# Altium PCB RobotArm_Olav_Nikolai.PcbDoc
Units mm, origin at the board's own origin, x right, y up, seen from the top; angles counter-clockwise.
Board outline 60 x 30 mm, 2 copper layers (Top Layer, Bottom Layer); 36 components, 60 nets, 160 pads, 13 vias.
Unrouted connection lines stored in the file: 1.
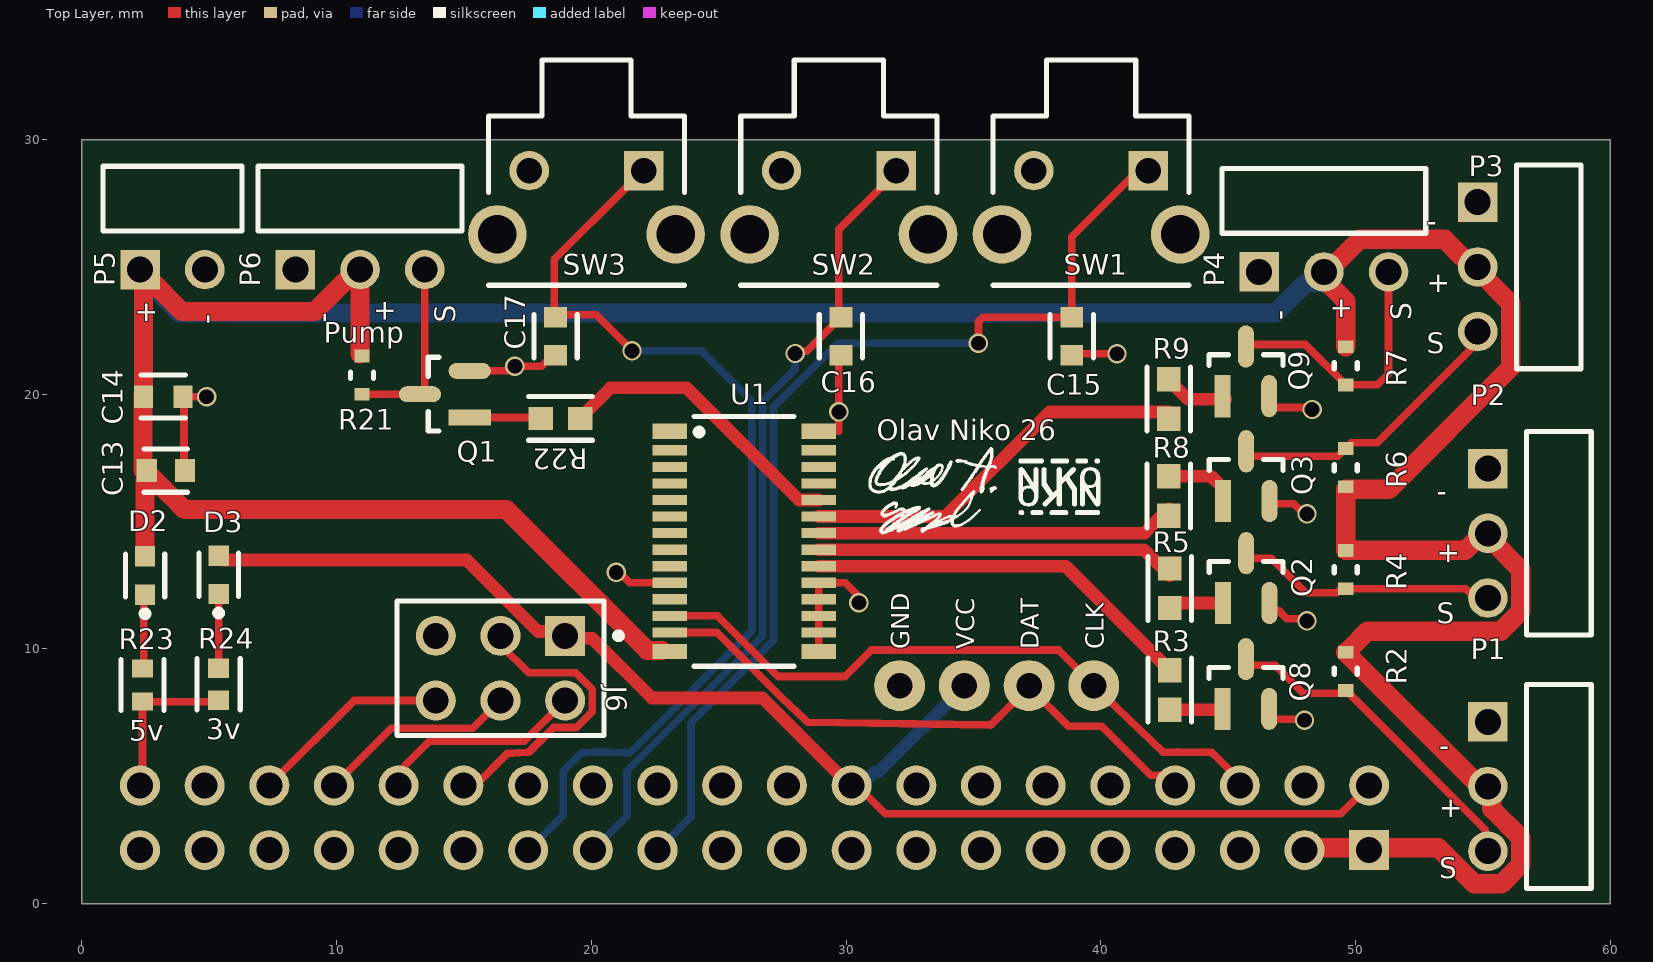
[diagram p0: Top Layer view]
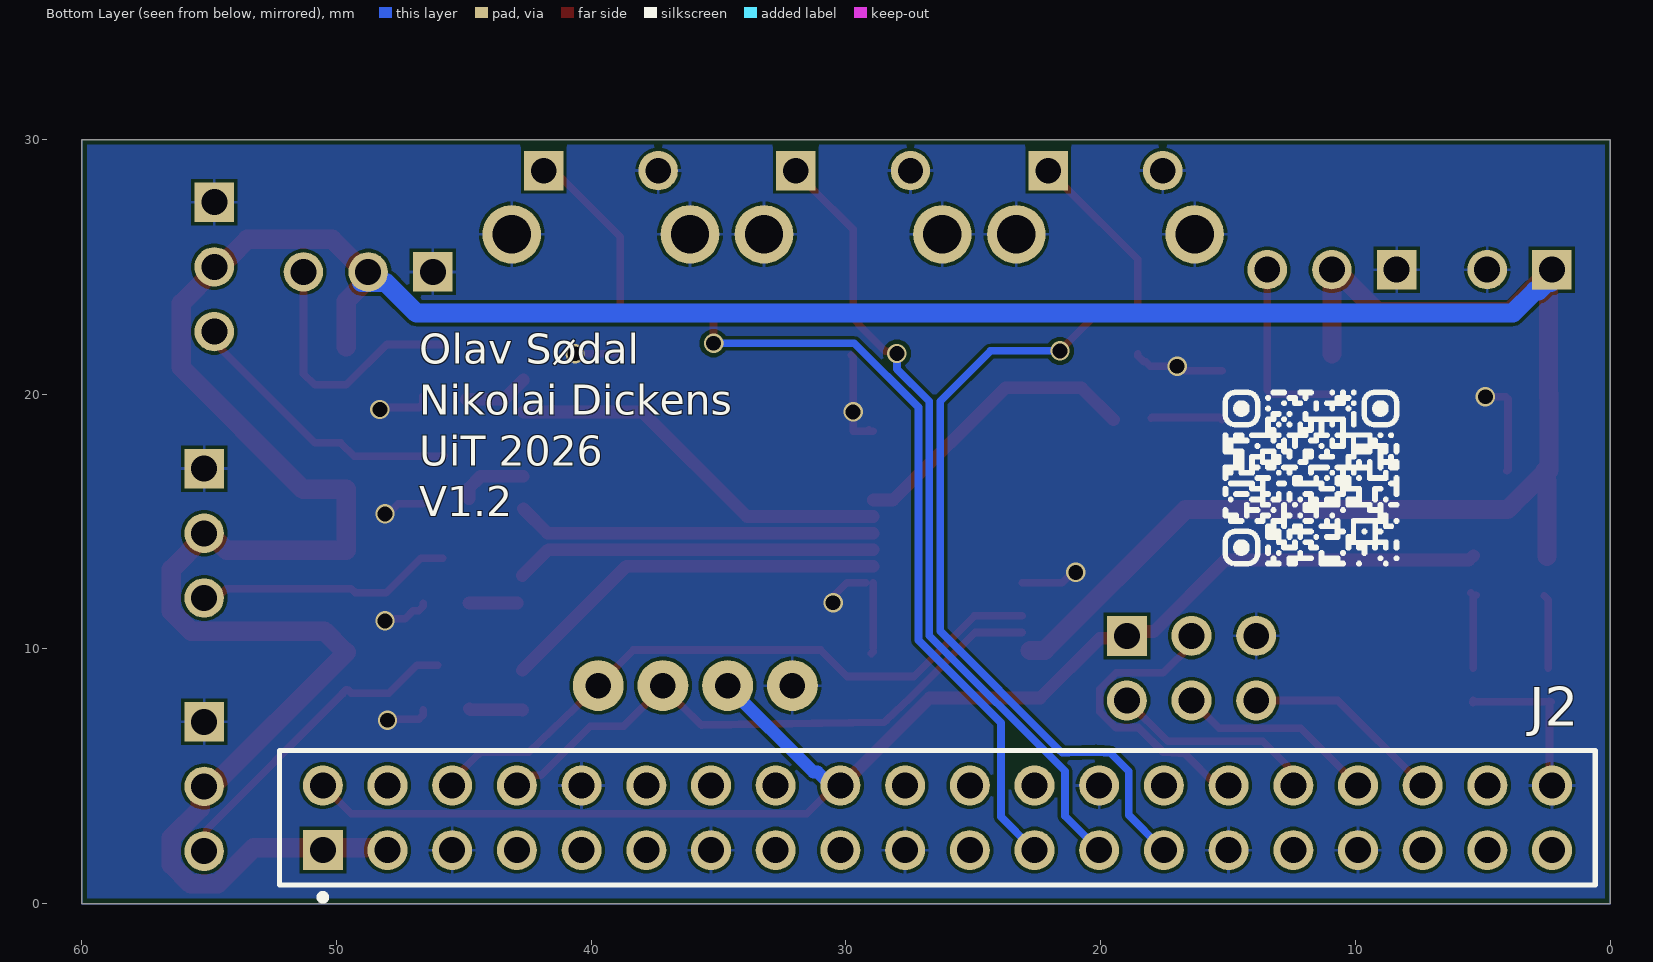
[diagram p1: Bottom Layer view, seen from below]
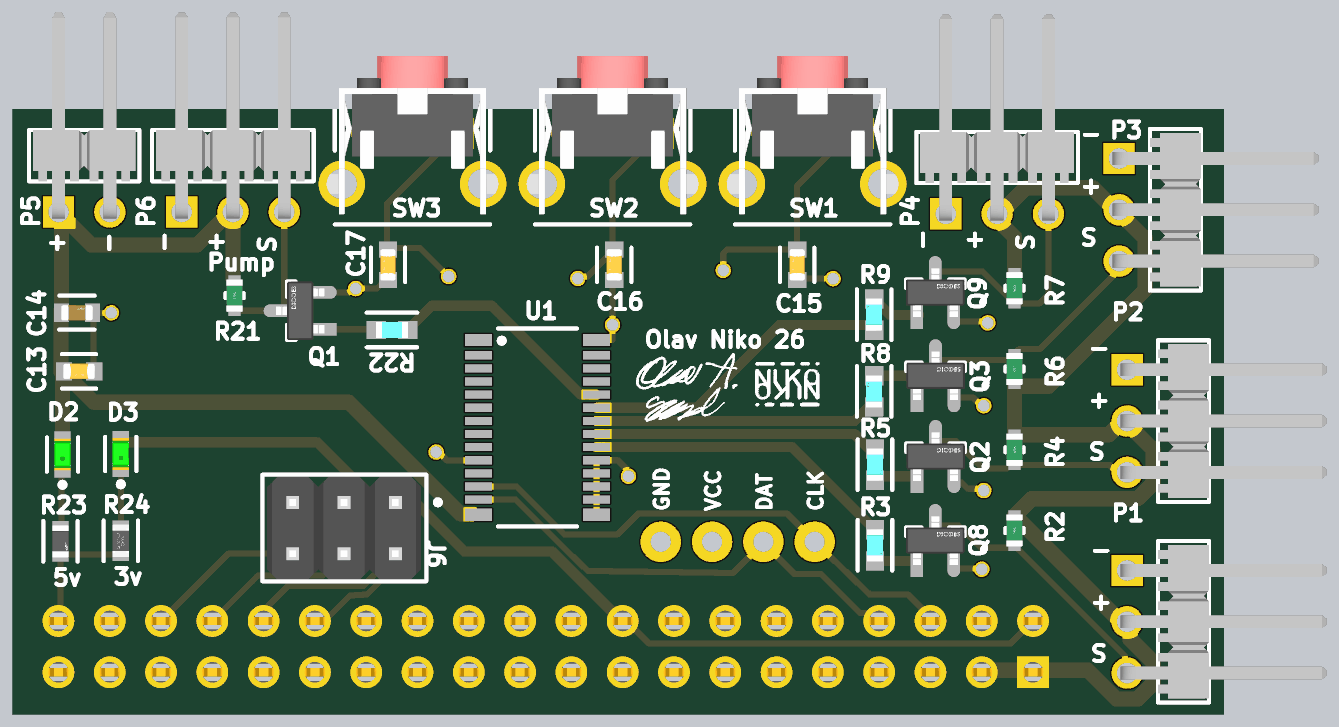
[diagram p2: 3D render of the assembled board from above, using the file's embedded part models]

## Layer stack, top to bottom
Top Solder: solder mask 0.0102, Solder Resist, Dk 3.5
Top Layer: signal copper 0.0356
Dielectric 1: dielectric 0.32, FR-4, Dk 4.8
Bottom Layer: signal copper 0.0356
Bottom Solder: solder mask 0.0102, Solder Resist, Dk 3.5

## Board outline
60,0 0,0 0,30 60,30

## Design rules (kind name [scope] priority, off if disabled: settings)
BoardOutlineClearance [All] p1: gap=0.2 ignorepadtopadclearanceinfootprint=FALSE
Clearance [All] p1: gap=0.127 ignorepadtopadclearanceinfootprint=FALSE except(0.25: Arc-Hole Track-Hole SMDPad-Hole THPad-Hole Via-Hole Fill-Hole Poly-Hole Region-Hole Text-Hole)
ComponentClearance [All] p1: gap=0.127 collisioncheckmode=3 verticalgap=0.127 showdistances=TRUE
DiffPairsRouting [All] p1: maxlimit=0.254 minlimit=0.127 mostfreqgap=0.127 toplayer_minwidth=0.127 toplayer_maxwidth=25.4 toplayer_prefwidth=0.127 bottomlayer_minwidth=0.127 bottomlayer_maxwidth=25.4 bottomlayer_prefwidth=0.127 maxuncoupledlength=12.7
Height [All] p1: minheight=0 maxheight=1816.048 prefheight=12.7
HoleSize [All] p1: absolutevalues=TRUE maxlimit=6.3 minlimit=0.3 maxpercent=80.000 minpercent=20.000
HoleToHoleClearance [All] p1: gap=0.25 allowstackedmicrovias=FALSE
MinimumAnnularRing [All] p1: minimumring=0.076
MinimumSolderMaskSliver [All] p1: minsoldermaskwidth=0
PlaneClearance [All] p1: clearance=0.127
PlaneConnect PlaneConnectPowerPads [InPadClass('PowerPads')] p1: planeconnectstyle=Direct reliefexpansion=0.508 reliefentries=4 reliefconductorwidth=0.254 reliefairgap=0.254
PlaneConnect [All] p2: pad.planeconnectstyle=Relief pad.reliefexpansion=0.3 pad.reliefentries=4 pad.reliefconductorwidth=0.127 pad.reliefairgap=0.127 via.planeconnectstyle=Direct via.reliefexpansion=0.3 via.reliefentries=4 via.reliefconductorwidth=0.127 via.reliefairgap=0.127
PolygonConnect PolygonConnectPowerPads [All vs (InPadClass('PowerPads'))] p1: connectstyle=Direct reliefconductorwidth=0.254 reliefentries=4 polygonreliefangle="90 Angle" airgapwidth=0.254
PolygonConnect [All] p2: thpad.connectstyle=Relief thpad.reliefconductorwidth=0.127 thpad.reliefentries=4 thpad.polygonreliefangle="90 Angle" thpad.airgapwidth=0.127 smdpad.connectstyle=Relief smdpad.reliefconductorwidth=0.127 smdpad.reliefentries=4 smdpad.polygonreliefangle="90 Angle" smdpad.airgapwidth=0.127 via.connectstyle=Direct via.reliefconductorwidth=0.127 via.reliefentries=4 via.polygonreliefangle="90 Angle" via.airgapwidth=0.127
RoutingVias [All] p1: holewidth=0.3 width=0.6 viastyle="Through Hole" minholewidth=0.3 minwidth=0.6 maxholewidth=0.6 maxwidth=6.6
SilkToSilkClearance [All] p1: silktosilkclearance=0
SilkToSolderMaskClearance [IsPad] p1: minsilkscreentomaskgap=0.127 clearancetoexposedcopper=TRUE
SolderMaskExpansion [All] p1: expansion=0.075 istentingtop=FALSE
SupplyNets "Schematic Supply Nets" [InNet('GND')] p1: voltage=0.000
SupplyNets "Schematic Supply Nets_1" [InNet('5V')] p2: voltage=0.000
SupplyNets "Schematic Supply Nets_3" [InNet('3V3')] p3: voltage=0.000
Width [All] p1: maxlimit=25.4 minlimit=0.127 preferedwidth=0.127 minimp=50.000000 maximp=50.000000 favimp=50.000000
20 further rules are at their usual default settings.

## Classes and differential pairs
component class Main: J6 P5
component class Designator: C13 C14 C15 C16 C17 D2 D3 J2 P1 P2 P3 P4 P6 Q1 Q2 Q3 Q8 Q9 R2 R3 R4 R5 R6 R7 R8 R9 R21 R22 R23 R24 SW1 SW2 SW3 U1

## Components (designator, comment, footprint, x,y, rotation, side; value= is the part's Value field where it differs from the comment)
C13 "GRM188R61A106KE69D" FP-GRM18-0_15-MFG 3.2,19.9 r0 top value=10uF
C14 "100 nF" FP-CC0603-DA-MFG 3.3,17 r0 top
C15 "100 nF" FP-CC0603-DA-MFG 38.862,22.276 r270 top
C16 "100 nF" FP-CC0603-DA-MFG 29.8,22.276 r270 top
C17 "100 nF" FP-CC0603-DA-MFG 18.6,22.276 r270 top
D2 "LTST-C193KGKT-5A" FP-LTST-C193KGKT-5A-MFG 2.481,12.884 r90 top
D3 "LTST-C193KGKT-5A" FP-LTST-C193KGKT-5A-MFG 5.368,12.909 r90 top
J2 "PPPC202LFBN-RC" FP-PPPC202LFBN-RC-MFG 26.41,3.37 r180 bottom
J6 "M20-9980346" FP-M20-9980346-MFG 16.434,9.246 r180 top
P1 "MTSW-103-08-L-S-229-RA" SMTC-MTSW-103-08-X-S-229-RA 55.2,7.14 r270 top
P2 "MTSW-103-08-L-S-229-RA" SMTC-MTSW-103-08-X-S-229-RA 55.2,17.08 r270 top
P3 "MTSW-103-08-L-S-229-RA" SMTC-MTSW-103-08-X-S-229-RA 54.8,27.54 r270 top
P4 "MTSW-103-08-L-S-229-RA" SMTC-MTSW-103-08-X-S-229-RA 46.22,24.8 r0 top
P5 "TSW-102-22-G-S-RA" SMTC-TSW-102-22-X-S-RA 2.286,24.892 r0 top
P6 "MTSW-103-08-L-S-229-RA" SMTC-MTSW-103-08-X-S-229-RA 8.382,24.892 r0 top
Q1 "MMBT3904-7-F" FP-SOT23-IPC_A 14.25,20 r180 top
Q2 "MMBT3904-7-F" FP-SOT23-IPC_A 45.712,12.783 r90 top
Q3 "MMBT3904-7-F" FP-SOT23-IPC_A 45.712,16.783 r90 top
Q8 "MMBT3904-7-F" FP-SOT23-IPC_A 45.7,8.623 r90 top
Q9 "MMBT3904-7-F" FP-SOT23-IPC_A 45.7,20.9 r90 top
R2 "SG73P1JTTD1002F" FP-SG73P1J-MFG 49.62,9.117 r90 top
R3 "RK73G1JTTD1001F" FP-RK73G1J-IPC_B 42.712,8.387 r270 top
R4 "SG73P1JTTD1002F" FP-SG73P1J-MFG 49.62,13.117 r90 top
R5 "RK73G1JTTD1001F" FP-RK73G1J-IPC_B 42.712,12.38 r270 top
R6 "SG73P1JTTD1002F" FP-SG73P1J-MFG 49.62,17.117 r270 top
R7 "SG73P1JTTD1002F" FP-SG73P1J-MFG 49.62,21.117 r90 top
R8 "RK73G1JTTD1001F" FP-RK73G1J-IPC_B 42.672,16.006 r90 top
R9 "RK73G1JTTD1001F" FP-RK73G1J-IPC_B 42.672,19.808 r90 top
R21 "SG73P1JTTD1002F" FP-SG73P1J-MFG 11,20.75 r90 top
R22 "RK73G1JTTD1001F" FP-RK73G1J-IPC_B 18.796,19.05 r180 top
R23 "RC1608J222CS" FP-RC1608-IPC_C 2.381,8.584 r270 top
R24 "CRGCQ0603J3K3" FP-CRGCQ0603-IPC_C 5.368,8.609 r270 top value=3.3KΩ
SW1 "B3F-3122" FP-B3F-3122-MFG 39.624,28.702 r180 top
SW2 "B3F-3122" FP-B3F-3122-MFG 29.718,28.702 r180 top
SW3 "B3F-3122" FP-B3F-3122-MFG 19.812,28.702 r180 top
U1 "PCA9685PW/Q900,118" SOT361-1_V 26,14.222 r180 top

## Footprints (in the part's own frame and the unit in brackets; to place one, negate y for a bottom-side part, rotate by r counter-clockwise, add the part's x,y. Pads: shape width x height; smd on the part's side, far side on the other; paste and mask are expansions set on the pad)
FP-B3F-3122-MFG [mm]
  rect 1.55x1.55 hole 1 paste-2539.97 mask+0: 1(-2.25,-0.075)
  round 1.55 hole 1 paste-2539.97 mask+0: 2(2.25,-0.075)
  round 2.3 hole 1.5 paste-2539.97 mask+0: 3(-3.5,2.425) 4(3.5,2.425)
  silkscreen extent -3.85,-4.43 3.85,4.43, body extent -4.75,-4.52 4.75,4.52, height 0.25
FP-CC0603-DA-MFG [mm]
  rect 0.8x0.9 smd paste+0 mask+0: 1(-0.75,0) 2(0.75,0)
  silkscreen extent -0.85,-0.85 0.85,0.85, body extent -1.35,-0.75 1.35,0.75, height 0.25
FP-CRGCQ0603-IPC_C [mm]
  rect 0.758x0.812 smd paste+0 mask+0: 1(-0.627,0) 2(0.627,0)
  silkscreen extent -1.01,-0.85 1.01,0.85, body extent -1.11,-0.55 1.11,0.55, height 0.25
FP-GRM18-0_15-MFG [mm]
  rect 0.75x0.9 smd paste+0 mask+0: 1(-0.775,0) 2(0.775,0)
  silkscreen extent -0.88,-0.83 0.87,0.85, body extent -1.25,-0.58 1.25,0.58, height 0.25
FP-LTST-C193KGKT-5A-MFG [mm]
  rect 0.8x0.8 smd paste+0 mask+0: 1(-0.75,0) 2(0.75,0)
  silkscreen extent -1.62,-0.77 0.85,0.77, body extent -1.25,-0.55 1.25,0.55, height 0.25
FP-M20-9980346-MFG [mm]
  rect 1.57x1.57 hole 1.02 paste-2539.97 mask+0: 1(-2.54,-1.27)
  round 1.57 hole 1.02 paste-2539.97 mask+0: 2(-2.54,1.27) 3(0,-1.27) 4(0,1.27) 5(2.54,-1.27) 6(2.54,1.27)
  silkscreen extent -4.76,-2.64 4.06,2.64, body extent -3.8,-2.53 3.82,2.55, height 8.64
FP-PPPC202LFBN-RC-MFG [mm]
  rect 1.57x1.57 hole 1.02 paste-2539.97 mask+0: 1(-24.13,-1.27)
  round 1.57 hole 1.02 paste-2539.97 mask+0: 2(-24.13,1.27) 3(-21.59,-1.27) 4(-21.59,1.27) 5(-19.05,-1.27) 6(-19.05,1.27) 7(-16.51,-1.27) 8(-16.51,1.27) 9(-13.97,-1.27) 10(-13.97,1.27) 11(-11.43,-1.27) 12(-11.43,1.27) 13(-8.89,-1.27) 14(-8.89,1.27) 15(-6.35,-1.27) 16(-6.35,1.27) 17(-3.81,-1.27) 18(-3.81,1.27) 19(-1.27,-1.27) 20(-1.27,1.27) 21(1.27,-1.27) 22(1.27,1.27) 23(3.81,-1.27) 24(3.81,1.27) 25(6.35,-1.27) 26(6.35,1.27) 27(8.89,-1.27) 28(8.89,1.27) 29(11.43,-1.27) 30(11.43,1.27) 31(13.97,-1.27) 32(13.97,1.27) 33(16.51,-1.27) 34(16.51,1.27) 35(19.05,-1.27) 36(19.05,1.27) 37(21.59,-1.27) 38(21.59,1.27) 39(24.13,-1.27) 40(24.13,1.27)
  silkscreen extent -25.83,-3.24 25.83,2.64, body extent -25.65,-2.54 25.65,2.54, height 8.7
FP-RC1608-IPC_C [mm]
  rect 0.71x0.812 smd paste+0 mask+0: 1(-0.651,0) 2(0.651,0)
  silkscreen extent -1.01,-0.85 1.01,0.85, body extent -1.11,-0.55 1.11,0.55, height 0.25
FP-RK73G1J-IPC_B [mm]
  rect 0.956x0.912 smd paste+0 mask+0: 1(-0.775,0) 2(0.775,0)
  silkscreen extent -1.25,-0.86 1.25,0.86, body extent -1.5,-0.71 1.5,0.71, height 0.25
FP-SG73P1J-MFG [mm]
  rect 0.5x0.6 smd paste+0 mask+0: 1(-0.75,0) 2(0.75,0)
  silkscreen extent -0.13,-0.45 0.13,0.45, body extent -1.1,-0.55 1.1,0.55, height 0.25
FP-SOT23-IPC_A [mm]
  rect 1.659x0.627 smd paste+0 mask+0: 1(-0.977,0.915)
  rrect100% 1.659x0.627 smd paste+0 mask+0: 2(-0.977,-0.915) 3(0.977,0)
  silkscreen extent 0.23,-1.45 0.65,1.45, body extent -2.31,-1.95 2.31,1.95, height 0.25
SMTC-MTSW-103-08-X-S-229-RA [mm] "Assembly .025\" [.64] SQ Post Terminal Strip, 1x3 Pins, Right Angle, 2.54mm Pitch, Male"
  rect 1.55x1.55 hole 1.02: 1(0,0)
  round 1.55 hole 1.02: 2(2.54,0) 3(5.08,0)
  silkscreen extent -1.46,1.52 6.54,4.06, body extent -1.27,-0.32 6.35,9.88, height 3.05
SMTC-TSW-102-22-X-S-RA [mm] ".025 SQ Post Terminal Strip Assembly, 1x2 Pins, Right Angle, 2.54mm Pitch, Male"
  rect 1.55x1.55 hole 1.02: 1(0,0)
  round 1.55 hole 1.02: 2(2.54,0)
  silkscreen extent -1.46,1.52 4,4.06, body extent -1.27,-0.32 3.81,9.9, height 3.05
SOT361-1_V [mm] "SOP, 28-Leads, Body 9.7x4.4mm, Pitch 0.65mm, NXP Recommended"
  rect 1.35x0.6 smd: 1(-2.925,4.325) 14(-2.925,-4.325) 15(2.925,-4.325) 28(2.925,4.325)
  rect 1.35x0.4 smd: 2(-2.925,3.575) 3(-2.925,2.925) 4(-2.925,2.275) 5(-2.925,1.625) 6(-2.925,0.975) 7(-2.925,0.325) 8(-2.925,-0.325) 9(-2.925,-0.975) 10(-2.925,-1.625) 11(-2.925,-2.275) 12(-2.925,-2.925) 13(-2.925,-3.575) 16(2.925,-3.575) 17(2.925,-2.925) 18(2.925,-2.275) 19(2.925,-1.625) 20(2.925,-0.975) 21(2.925,-0.325) 22(2.925,0.325) 23(2.925,0.975) 24(2.925,1.625) 25(2.925,2.275) 26(2.925,2.925) 27(2.925,3.575)
  silkscreen extent -1.96,-4.9 1.96,4.9, body extent -2.2,-4.85 2.2,4.85, height 1.1

## Part data
C13: library part CMP-2000-05448-2, "CAP CER 10UF 10V X5R 0603", Capacitance=10uF, Manufacturer=Murata, Package=GRM18-0.15, Temperature="-55°C to +85°C", Temperature Characteristic=X5R, Temperature Coefficient=15%, Temperature Range High=+85°C, Temperature Range Low=-55°C, Tolerance=10%, Voltage Rating=10V, Automotive=No, Category=Cap, ComponentLink2Description=Datasheet, ComponentLink2URL=https://search.murata.co.jp/Ceramy/image/img/A01X/G101/ENG/GRM188R61A106KE69-01A.pdf, Device Class L1="Passive Components", Device Class L2=Capacitors, Device Class L3="Ceramic Capacitors", Digikey Description="CAP CER 10UF 10V X5R 0603", Height=0.95mm, Lead Free=Yes, Manufacturer Part Number=GRM188R61A106KE69D, Material=Ceramic, Mouser Description="Multilayer Ceramic Capacitors MLCC - SMD/SMT 0603 10uF 10volts X5R + - 10%", Octopart=https://octopart.com/grm188r61a106ke69d-murata-22851381, RoHS=TRUE
C14 C15 C16 C17: library part CMP-03422-000081-1, "CC0603 100 nF X7R 10.00% 25 V", Manufacturer=YAGEO, Manufacturer Part Number=CC0603KPX7R8BB104, Package=CC0603-DA, Temperature="-55°C to +125°C", Temperature Characteristic=X7R, Temperature Coefficient=15%, Temperature Range High=+125°C, Temperature Range Low=-55°C, Tolerance=0.1, Voltage="25 V", Automotive=No, Capacitance="100 nF", Category=Cap, ComponentLink2Description=Datasheet, ComponentLink2URL=http://www.yageo.com/documents/recent/UPY-GPHC_X7R_6.3V-to-50V_18.pdf, Device Class L1="Passive Components", Device Class L2=Capacitors, Device Class L3="Ceramic Capacitors", Footprint Url=http://www.yageo.com/exep/pages/download/literatures/UPY-C_GEN_24.pdf, Height=0.9mm, Lead Free=Yes, Material=Ceramic, Mouser Description="Multilayer Ceramic Capacitors MLCC - SMD/SMT 100nF 25V X7R 10%", Octopart=https://octopart.com/cc0603kpx7r8bb104-yageo-12885111, RoHS=TRUE, Voltage Rating="25 V"
D2 D3: library part CMP-2000-06622-2, "LED GREEN CLEAR CHIP SMD", Case Code (Imperial)=0603, Case Code (Metric)=1608, Color=Green, Forward Current=30mA, Forward Voltage=2.3V, Lens Color=Colorless, Max Operating Temperature=85°C, Min Operating Temperature=-55°C, Package Quantity=3000, Power Dissipation=75mW, Reverse Voltage=5V, Test Current=5mA, Case/Package=0603, Depth=0.8mm, Dominant Wavelength=576.5nm, Height=0.35mm, Illumination Color=Green, Lead Free="Lead Free", Length=1.6mm, Lens Style=Diffused, Lens Transparency=Clear, Luminous Intensity=28mcd, Mount="Surface Mount", Number of Elements=1, Number of LEDs=1, Number of Pins=2, Packaging="Tape and Reel", Power Rating=75mW, Radiation Hardening=No, Viewing Angle=130°, Width=0.8mm
J2: library part CMP-00595-00271136-1, "PPPC202LFBN-RC Female, 40C, Straight, .100\"CC; 3.20mm Tail, No Mt.; PBT, Phos Bronze, 105 C", Color=Black, Current Rating=3A, Max Operating Temperature=105°C, Min Operating Temperature=-40°C, Voltage Rating=250V, Connector Type="Header, Socket", Contact Material="Gold, Nickel", Contact Plating=Gold, Height=8.7mm, Housing Material=Plastic, Lead Free="Lead Free", Length=51.3mm, Mount="Through Hole", NexarPartId=271136, Number of Contacts=40, Number of Pins=2, Number of Positions=40, Number of Rows=2, Packaging=Bulk, Pitch=2.54mm, RoHS=Compliant, Row Spacing=2.54mm, Termination=Solder, Width=5mm
J6: library part CMP-2000-06636-2, "CONN HEADER VERT 6POS 2.54MM", Current Rating=3A, Manufacturer=Harwin, Temperature="-40°C to +105°C", Temperature Range High=+105°C, Temperature Range Low=-40°C, Automotive=No, Category=Conn, ComponentLink2Description=Datasheet, ComponentLink2URL=https://cdn.harwin.com/pdfs/M20-998.pdf, Conn Gender=Male, Conn Orientation=Vertical, Contact Material=Tin,Nickel, Device Class L1=Connectors, Device Class L2="Headers and Wire Housings", Device Class L3=unset, Digikey Description="CONN HEADER VERT 6POS 2.54MM", Height=8.99mm, Lead Free=Yes, Manufacturer Part Number=M20-9980346, Mouser Description="2.54mm (0.1\") Pitch DIL Vertical PC Tail Pin Header, 6.1mm mating pin height, tin, 3+3 contacts", Number of Contacts=6, Number of Rows=2, Octopart=https://octopart.com/m20-9980346-harwin-5436545, Package=M20-9980346, Pitch=2.54mm, RoHS=TRUE
P1 P2 P3 P4 P6: library part CMP-1024-00103-1, "Modified .025\" SQ Post Header, Through-hole, Right Angle, -55 to 125 degC, 2.54 mm Pitch, 3-Pin, Male, RoHS", Manufacturer=Samtec, Temperature Range="-55 to 125 degC", ComponentLink1Description="Manufacturer URL", ComponentLink1URL=http://www.samtec.com, ComponentLink2Description=Datasheet, ComponentLink2URL=http://www.samtec.com/documents/webfiles/pdf/MTSW.PDF, ComponentLink3Description="Package Specification", ComponentLink3URL=http://www.samtec.com/documents/webfiles/cpdf/MTSW-XXX-XX-X-X-XXXX-XX-XXX-MKT1.pdf, DatasheetVersion=F-214, Mounting Technology=Through-hole, Orientation="Right Angle", PackageDescription="Assembly .025\" [.64] SQ Post Terminal Strip", PackageReference=MTSW-103-08-X-S-229-RA, PackageVersion="BI, 2/1987", PartNumber=MTSW-103-08-L-S-229-RA, Pitch="2.54 mm", RoHS=True
P5: library part CMP-1024-00323-1, "0.025\" SQ Post Header, Through-hole, Right Angle, -55 to 125 degC, 2.54 mm Pitch, 2-Pin, Male, RoHS", Manufacturer=Samtec, Temperature Range="-55 to 125 degC", ComponentLink1Description="Manufacturer URL", ComponentLink1URL=http://www.samtec.com, ComponentLink2Description=Datasheet, ComponentLink2URL=http://www.samtec.com/documents/webfiles/pdf/TSW_TH.PDF, ComponentLink3Description="Package Specification", ComponentLink3URL=http://www.samtec.com/documents/webfiles/cpdf/TSW-XXX-XX-XXX-X-XX-XXX-MKT.pdf, DatasheetVersion=F-214, Mounting Technology=Through-hole, Orientation="Right Angle", PackageDescription=".025[0.64] SQ. Post Terminal Strip Assembly", PackageReference=TSW-102-22-X-S-RA, PackageVersion="DM, 8/1988", PartNumber=TSW-102-22-G-S-RA, Pitch="2.54 mm", RoHS=True
Q1 Q2 Q3 Q8 Q9: library part CMP-2000-04931-2, "TRANS NPN 40V 0.2A SMD SOT23-3", Case/Package=SOT-23, Collector Base Voltage (VCBO)=60V, Collector Emitter Breakdown Voltage=40V, Collector Emitter Saturation Voltage=300mV, Continuous Collector Current=200mA, Emitter Base Voltage (VEBO)=6V, Frequency=300MHz, Max Operating Temperature=150°C, Max Power Dissipation=300mW, Min Operating Temperature=-55°C, Package Quantity=3000, Power Dissipation=350mW, Collector Emitter Voltage (VCEO)=40V, Contact Plating=Tin, Element Configuration=Single, Gain Bandwidth Product=300MHz, Height=1mm, hFE Min=100, Lead Free="Lead Free", Length=3.05mm, Max Breakdown Voltage=40V, Max Collector Current=200mA, Max Frequency=300MHz, Mount="Surface Mount", Number of Elements=1, Number of Pins=3, Packaging="Tape and Reel", Polarity=NPN, Radiation Hardening=No, REACH SVHC="No SVHC", Transition Frequency=300MHz, Voltage Rating (DC)=40V, Weight=0.000282oz, Width=1.4mm
R2 R4 R6 R7 R21: library part CMP-00683-07748074-1, "SG73P1JTTD1002F Res Thick Film 0603 10K Ohm 1% 0.2W(1/5W) ±100ppm/C Pad SMD Automotive T/R", Case Code (Imperial)=0603, Case Code (Metric)=1608, Max Operating Temperature=155°C, Min Operating Temperature=-55°C, Power Rating=200mW, Resistance=10kΩ, Temperature Coefficient=100ppm/°C, Tolerance=1%, Voltage Rating=50V, Case/Package=0603, NexarPartId=7748074, Number of Pins=2, RoHS=Compliant, Termination=SMD/SMT, Voltage Rating (DC)=50V
R3 R5 R8 R9 R22: library part CMP-04015-096822-1, "1kΩ ±1% 0.1W Chip Resistor 0603 Thick Film AEC-Q200 Qualified", Case Code (Imperial)=0603, Case Code (Metric)=1608, Max Operating Temperature=155°C, Min Operating Temperature=-55°C, Power Rating=100mW, Resistance=1kR, Resistor Type="Thick Film", Tolerance=1%, Case/Package=0603, Construction=Rectangular, Depth=0.8mm, Length=1.6mm, Military Standard=Not, Packaging="Tape and Reel", RoHS Compliant=Yes, Series=RK73G, Termination=SMD/SMT
R23: library part CMP-13261-001595-1, "Res Thick Film 0603 2.2kΩ 5% 0.1W ±100ppm/°C Molded SMD T/R", Case Code (Imperial)=0603, Case Code (Metric)=1608, Max Operating Temperature=155°C, Max Power Dissipation=100mW, Min Operating Temperature=-55°C, Resistance=2.2kR, Temperature Coefficient=100ppm/°C, Tolerance=5%, Voltage Rating (DC)=50V, Case/Package=0603, Composition="Thick Film", Contact Plating=Tin, Depth=0.8mm, Features="Moisture Resistant", Height=0.022inch, Lead Free="Lead Free", Length=0.063inch, Military Standard=Not, Number of Terminations=2, Packaging="Tape and Reel", Power Rating=100mW, Radiation Hardening=No, Width=0.031inch
R24: library part CMP-03211-008656-1, "CRGCQ 0603 3K3 5%", Ambient Temperature Range High=+70°C, Manufacturer="TE Connectivity", Package=CRGCQ0603, Power Rating=0.1W, Resistance=3.3KΩ, Temperature="-55°C to +155°C", Temperature Coefficient=±100ppm/°C, Temperature Range High=+155°C, Temperature Range Low=-55°C, Tolerance=0.05, Voltage Rating=75V, Category=Res, ComponentLink2Description=Datasheet, ComponentLink2URL=https://www.te.com/commerce/DocumentDelivery/DDEController?Action=showdoc&DocId=Data+Sheet%7F1773204-3%7F1%7Fpdf%7FEnglish%7FENG_DS_1773204-3_1.pdf%7F4-2176339-809, Composition="Thick Film", Device Class L1="Passive Components", Device Class L2=Resistors, Device Class L3="Chip SMD Resistors", Digikey Description="CRGCQ 0603 3K3 5%", Height=0.55mm, Ipc Land Pattern Name=RESC16080X45, Lead Free=Yes, Manufacturer Part Number=CRGCQ0603J3K3, Octopart=https://octopart.com/crgcq0603j3k3-te+connectivity-91018121, RoHS=TRUE, Series=CRGCQ
SW1 SW2 SW3: library part CMP-08834-000053-1, "SWITCH TACTILE SPST-NO 0.05A 24V", Actuator Color=Grey, Contact Current Rating=50mA, Contact Resistance=100mR, Max Operating Temperature=70°C, Max Voltage Rating (DC)=24V, Min Operating Temperature=-25°C, Operating Force=1.47N, Package Quantity=1000, Ratings=IP00, Actuator Length=1.6mm, Actuator Type=Standard, Contact Material=Gold, Contact Plating=Gold, Current Rating=50mA, Depth=7.85mm, Electrical Life=300000Cycles, Height=7.4mm, Illumination Type=Non-Illuminated, Lead Free="Lead Free", Length=7.3mm, Max Current Rating=50mA, Mechanical Life=300000Cycles, Mount="Through Hole", Number of Poles=1, Orientation="Right Angle", Packaging=Bulk, Radiation Hardening=No, RoHS Compliant=Yes, Series=B3F, Switch Function=Off-Mom, Switch Travel=0.25mm, Termination="PC Pins", Throw Configuration=SPST, Voltage Rating (DC)=24V, Weight=0.25g, Width=6.25mm
U1: library part CMP-1595-00002-2, "16-Channel, 12-Bit PWM Fm+ I2C-Bus LED Controller, 2.3 to 5.5 V, -40 to 85 degC, 28-Pin TSSOP (SOT361-1), RoHS, Tape and Reel", Frequency="25000000 Hz", PartNumber=PCA9685, Supply Current Max="10 mA", Supply Voltage Max="5.5 V", Supply Voltage Min="2.3 V", Temperature Max="85 degC", Temperature Min="-40 degC", Code_JEDEC=MO-153, ComponentLink1Description="Manufacturer URL", ComponentLink1URL=http://www.nxp.com/, ComponentLink2Description=Datasheet, ComponentLink2URL=http://www.nxp.com/documents/data_sheet/PCA9685.pdf, ComponentLink3Description="Package Specification", ComponentLink3URL=http://www.nxp.com/documents/outline_drawing/sot361-1_po.pdf, DatasheetVersion="Rev. 4", Mounting Technology="Surface Mount", PackageDescription="28-Pin Small Outline Package, Body 9.7 x 4.4 mm, Pitch 0.65 mm", PackageVersion=02/2003, Packing="Tape and Reel", RoHS=TRUE

## Free pads (board coordinates)
  round 2 / inner round 1.524 / far side round 2 hole 1: 2(32.106,8.56) 2(34.646,8.56) 2(37.186,8.56) 2(39.726,8.56)

## Via types
v1: diameter 0.762, hole 0.584, Top Layer to Bottom Layer, 13 vias

## Nets (pads, with @x,y where several pads share a name; then routed paths per layer and width w, separated by ;. In a path a pad name is that pad's centre, name@x,y a point inside that pad or via, vN(x,y) a via of type N, cw(c..) or ccw(c..) an arc to the next point about the centre after c; other vN are vias at no path point)
3V3: D3.2 J2.2 J2.18 J6.1 pad.2@34.646,8.56 | length 55.7
  Top Layer w0.3: J2.18@30.4,4.66 31.535,3.525 49.425,3.525 J2.2@50.64,4.74
  Top Layer w0.5: D3.2 5.539,13.487 15.113,13.487 17.915,10.686 18.804,10.686 J6.1 19.068,10.422 20.033,10.422 22.377,8.077 26.721,8.077 30.058,4.74 J2.18@30.32,4.74
  Bottom Layer w0.5: J2.18@30.32,4.74 30.692,4.74 31.12,5.168 31.279,5.168 pad.2@34.62,8.509
5V: C13.1 C14.1 D2.2 J2.1 J2.3 P1.2 P2.2 P3.2 P4.2 P5.1 P6.2 R2.2 R4.2 R6.2 R7.2 R21.2 U1.28 | length 158.8
  Top Layer w0.75: P5.1 2.614,24.564 3.928,23.25 9.147,23.25 10.647,24.75 P6.2@11,24.75 ; C14.1@2.4,17 C13.1@2.4,20 ; C13.1 P5.1@2.425,24.375 ; D2.2 2.481,16.611 2.525,16.655 C14.1@2.525,17 ; C14.1 2.55,16.95 3.148,16.352 3.148,16.342 3.442,16.048 3.452,16.048 4.031,15.469 16.668,15.469 22.192,9.945 U1.28@22.775,9.945 ; R21.2@10.922,21.578 P6.2
  Top Layer w0.762: J2.3@48,2.2 50.64,2.2 53.246,2.2 54.669,0.777 55.731,0.777 56.483,1.529 56.483,2.591 55.351,3.724 55.351,4.449 P1.2 ; P4.2@48.7,24.8 48.7,24.576 49.62,23.656 R7.2 ; P4.2 48.893,24.8 50.176,26.083 53.501,26.083 54.19,25.394 54.193,25.394 54.587,25 P3.2 54.8,24.867 56.1,23.567 56.1,21.048 51.318,16.266 49.62,16.266 R4.2@49.62,13.968 ; R2.2 55.087,4.4 P1.2@55.187,4.4 ; R4.2 54.31,13.867 54.984,14.54 P2.2 55.2,14.407 56.483,13.124 56.483,11.469 55.714,10.7 50.478,10.7 R2.2@49.746,9.968
  Bottom Layer w0.75: P5.1@2.318,24.384 2.491,24.384 2.811,24.064 2.945,24.064 3.822,23.187 46.867,23.187 48.064,24.384 49.022,24.384 P4.2@49.022,24.867
GND: C13.2 C14.2 C15.2 C16.2 C17.2 J2.5 J2.10 J2.13 J2.19 J2.26 J2.29 J2.33 J2.40 J6.5 P1.1 P2.1 P3.1 P4.1 P5.2 P6.1 pad.2@32.106,8.56 Q1.2 Q2.2 Q3.2 Q8.2 Q9.2 R23.2 R24.2 SW1.2 SW1.3 SW1.4 SW2.2 SW2.3 SW2.4 SW3.2 SW3.3 SW3.4 U1.1 U1.2 U1.3 U1.4 U1.5 U1.14 U1.24 | length 33.9
  Top Layer w0.3: R23.2@2.311,7.925 2.38,7.925 J2.40@2.38,4.74 ; R23.2@2.393,7.944 R23.2 5.385,7.932 R24.2@5.385,7.899 ; C14.2 4.013,17.037 4.013,19.813 4.1,19.9 v1@4.8,19.9 ; R24.2@5.355,7.97 R24.2 R24.2@5.376,7.99 ; Q1.2 16.69,20.915 16.787,21.012 16.988,21.012 v1@17,21 ; v1(17,21.1) 18.052,21.1 18.228,21.276 18.3,21.276 18.542,21.518 C17.2@18.542,21.59 ; v1(20.981,13.005) 21.106,13.005 21.514,12.597 U1.24 ; U1.1 U1.1@28.998,9.823 ; U1.1@28.925,10.025 U1.2 U1.3 U1.4 U1.5 ; U1.14 29.718,18.547 v1(29.718,19.304) 29.718,21.444 C16.2 ; U1.14@29.1,18.6 U1.14@29.127,18.574 ; U1.5@29.235,12.598 29.972,12.598 30.417,12.153 30.417,11.899 v1(30.505,11.811) ; C15.2 38.862,21.59 v1(40.64,21.59) ; Q8.2@46.6,7.6 46.6,7.406 46.766,7.24 47.96,7.24 v1(48,7.2) ; Q2.2@46.6,11.8 46.6,11.678 46.778,11.5 47,11.5 47.312,11.188 48.012,11.188 v1(48.1,11.1) ; Q3.2@46.6,15.7 47.575,15.7 47.975,15.3 v1(48.1,15.3) ; Q9.2 46.615,19.63 46.766,19.479 48.121,19.479 v1@48.3,19.3 ; P1.1@54.96,6.7 P1.1@55.2,6.94 ; P2.1@55.02,16.9 P2.1
  other v1: 48.3,19.4 4.9,19.9
"Green (S+)_1": 
"Green (S+)_2": 
"Green (S+)_3": 
HX711_1: J2.32 J6.2 | length 8.1
  Top Layer w0.3: J2.32@12.54,4.74 12.683,4.883 12.683,5.419 13.64,6.375 17.374,6.375 J6.2
HX711_2: J2.34 J6.4 | length 7.8
  Top Layer w0.3: J2.34@10,4.74 12.143,6.883 15.342,6.883 J6.4
HX711_3: J2.36 J6.6 | length 7.8
  Top Layer w0.3: J2.36@7.46,4.74 10.696,7.976 J6.6
Knapp_1: C15.1 J2.23 SW1.1 | length 39.3
  Top Layer w0.3: v1(35.2,22) 35.2,22.85 35.376,23.026 C15.1 ; C15.1@38.862,23.114 38.862,26.187 SW1.1@41.25,28.575
  Bottom Layer w0.3: J2.23@22.7,2.2 23.915,3.415 23.915,7.1 27.154,10.339 27.154,19.483 29.671,22 v1(35.2,22)
Knapp_2: C16.1 J2.25 SW2.1 | length 31.7
  Top Layer w0.3: v1(28,21.6) 28.088,21.688 28.462,21.688 29.5,22.726 29.5,22.776 29.75,23.026 C16.1 ; C16.1@29.718,23.114 29.718,26.468 31.343,28.093 31.343,28.152 31.941,28.75 SW2.1@32,28.75
  Bottom Layer w0.3: J2.25@20.16,2.2 21.4,3.44 21.4,5.195 26.727,10.522 26.727,19.717 28,20.99 v1(28,21.6)
Knapp_3: C17.1 J2.27 SW3.1 | length 38.5
  Top Layer w0.3: v1(21.6,21.7) 20.186,23.114 18.542,23.114 18.542,25.292 21.402,28.152 21.437,28.152 22,28.715 SW3.1@22,28.75
  Bottom Layer w0.3: J2.27@17.62,2.2 18.9,3.48 ; 18.9,3.5 18.9,5.198 19.533,5.83 19.621,5.918 19.865,5.918 cw(c20.16,4.74) 20.201,5.954 21.265,5.918 21.514,5.918 21.602,6.006 26.3,10.704 26.3,19.725 24.325,21.7 v1(21.6,21.7)
NetC4_1: 
NetC4_2: 
NetC10_1: 
NetC10_2: 
NetC12_1: 
NetC12_2: 
NetD2_1: D2.1 R23.1 | length 2.9
  Top Layer w0.3: R23.1@2.431,9.235 2.431,11.934 D2.1@2.581,12.084
NetD3_1: D3.1 R24.1 | length 3.2
  Top Layer w0.3: D3.1@5.268,12.109 D3.1@5.368,12.009 ; R24.1 5.368,12.109 D3.1@5.468,12.209
NetHC711_3_2: 
NetHC711_3_4: 
NetHX711_1_2: 
NetHX711_1_4: 
NetHX711_2_2: 
NetHX711_2_4: 
NetJ6_3: 
NetP1_3: P1.3 Q8.3 R2.1 | length 12.9
  Top Layer w0.3: 46.036,9.359 46.858,9.359 47.952,8.266 49.414,8.266 R2.1@49.53,8.382 ; R2.1@49.6,8.4 49.637,8.4 49.77,8.267 49.77,8.23 55.104,2.896 55.104,1.956 P1.3@55.2,1.86
NetP2_3: P2.3 Q2.3 R4.1 | length 10.1
  Top Layer w0.3: Q2.3@45.837,13.558 46.697,13.558 48.055,12.2 49.257,12.2 49.424,12.367 54.335,12.367 54.549,12.153 55.047,12.153 P2.3
NetP3_3: P3.3 Q3.3 R6.1 | length 11.3
  Top Layer w0.3: Q3.3@45.774,17.558 49.308,17.558 49.847,18.097 50.863,18.097 54.647,21.881 54.647,22.307 P3.3
NetP4_3: P4.3 Q9.3 R7.1 | length 10.1
  Top Layer w0.3: Q9.3@45.883,21.952 48.034,21.952 R7.1 50.861,20.367 51.3,20.806 51.3,24.63 P4.3@51.308,24.638
NetP6_3: P6.3 Q1.3 R21.1 | length 7.4
  Top Layer w0.3: R21.1 Q1.3 ; Q1.3@13.311,20 13.462,20.151 13.462,24.962 P6.3@13.5,25
NetQ1_1: Q1.1 R22.2 | length 2.8
  Top Layer w0.3: Q1.1@15.25,19 15.335,19.085 17.986,19.085 R22.2
NetQ2_1: Q2.1 R5.2 | length 1.9
  Top Layer w0.5: R5.2@42.906,11.806 Q2.1
NetQ3_1: Q3.1 R8.2 | length 2.7
  Top Layer w0.5: R8.2 44.338,16.782 44.8,16.319 Q3.1@44.8,15.9
NetQ5_1: 
NetQ6_1: 
NetQ7_1: 
NetQ8_1: Q8.1 R3.2 | length 2.1
  Top Layer w0.5: R3.2@42.7,7.6 R3.2 44.75,7.611 Q8.1
NetQ9_1: Q9.1 R9.2 | length 2.5
  Top Layer w0.5: R9.2@42.672,20.561 43.433,19.8 Q9.1@44.9,19.8
NetR1_1: 
NetR10_1: 
NetR13_1: 
NetR14_1: 
NetR17_1: 
NetR18_1: 
PD_SCK: J2.30 J6.3 | length 11.7
  Top Layer w0.3: J2.30@15.138,4.724 15.212,4.651 15.459,4.651 16.704,5.896 17.498,5.948 cw(c17.62,4.74) 17.555,5.953 18.516,6.914 19.414,6.914 20.036,7.536 20.036,8.415 19.629,8.822 19.383,9.068 17.538,9.068 16.434,10.172 J6.3
PWM_0: R3.1 U1.6 | length 15.5
  Top Layer w0.5: U1.6 38.627,13.247 R3.1
PWM_1: R5.1 U1.7 | length 14.2
  Top Layer w0.5: U1.7 41.695,13.897 42.708,12.883 R5.1@42.712,12.883
PWM_2: R8.1 U1.8 | length 14.1
  Top Layer w0.5: U1.8 41.716,14.547 R8.1@42.672,15.503
PWM_3: R9.1 U1.9 | length 15.4
  Top Layer w0.5: U1.9 33.889,15.197 37.996,19.304 R9.1@42.672,19.304
PWM_4: R22.1 U1.10 | length 11.8
  Top Layer w0.5: R22.1@19.5,19 20.75,20.25 23.75,20.25 28.153,15.847 U1.10
"RED (E+)_1": 
"RED (E+)_2": 
"RED (E+)_3": 
SCL: J2.6 pad.2@39.726,8.56 U1.26 | length 25.8
  Top Layer w0.3: U1.26 24.953,11.297 27.335,8.915 29.947,8.915 30.988,9.957 38.354,9.957 pad.2@39.776,8.534 ; pad.2@39.726,8.56 42.459,5.948 42.898,5.948 cw(c43.02,4.74) 43.142,5.948 44.356,5.944 44.443,5.857 45.118,5.182 J2.6@45.415,5.182
SDA: J2.4 J2.8 pad.2@37.186,8.56 U1.27 | length 23.6
  Top Layer w0.3: U1.27@23.089,10.643 23.093,10.647 24.919,10.647 27.482,8.084 28.412,7.199 28.497,7.118 35.674,7.016 37.223,8.521 pad.2@37.236,8.534 ; pad.2@37.211,8.484 38.735,6.96 40.04,6.96 41.964,5.036 42.724,5.036 J2.8@43.02,4.74
"White (S-)_1": 
"White (S-)_2": 
"White (S-)_3": 
pads on no net: J2.7 J2.9 J2.11 J2.12 J2.14 J2.15 J2.16 J2.17 J2.20 J2.21 J2.22 J2.24 J2.28 J2.31 J2.35 J2.37 J2.38 J2.39 U1.11 U1.12 U1.13 U1.15 U1.16 U1.17 U1.18 U1.19 U1.20 U1.21 U1.22 U1.23 U1.25

## Polygon pours and split planes (outlines as drawn)
GND on Bottom Layer "GND_L02_P001" (solid, pour order 1): 0,0 0,30 60,30 60,0
GND on Bottom Layer "NONET_L02_P000" (solid, shelved, pour order 0): 0,0 0,30 60,30 60,0

## Silkscreen, mask and mechanical layers (free items; w line width, h text height)
Top Overlay:
  drawing of 15 lines, arcs and shapes, not listed
  text "- /  / + /  / S" at 52.2,22.9 h0.8 r90
  text "- /  / + /  / S" at 14.65,22.8 h0.8 r90
  text "+ /  / -" at 5.276,22.75 h0.8 r90
  text "Pump" at 9.504,22.021 h0.8
  text "- /  / + /  / S" at 52.8,21.6 h0.8
  text "Olav Niko 26" at 31.2,18.2 h0.8
  text "- /  / + /  / S" at 53.2,11 h0.8
  text "GND" at 32.49,9.979 h0.7 r90
  text "VCC" at 35.03,9.979 h0.7 r90
  text "DAT" at 37.57,9.979 h0.7 r90
  text "CLK" at 40.11,9.979 h0.7 r90
  text "3v" at 4.877,6.452 h0.8
  text "5v" at 1.854,6.401 h0.8
  text "- /  / + /  / S" at 53.3,1 h0.8
Bottom Overlay:
  drawing of 80 lines, arcs and shapes, not listed
  text "Olav Sødal / Nikolai Dickens / UiT 2026 / V1.2" at 46.761,14.808 h2